# Altium PCB Capybara.PcbDoc (part 4 of 5)
Units mil, origin at the board's own origin, x right, y up, seen from the top; angles counter-clockwise.
Board outline 2270 x 2270 mil, 4 copper layers (Top Layer, GND, Signal, Bottom Layer), stack 61.8 mil thick; 394 components, 234 nets, 1155 pads, 211 vias.
Unrouted connection lines stored in the file: 4.
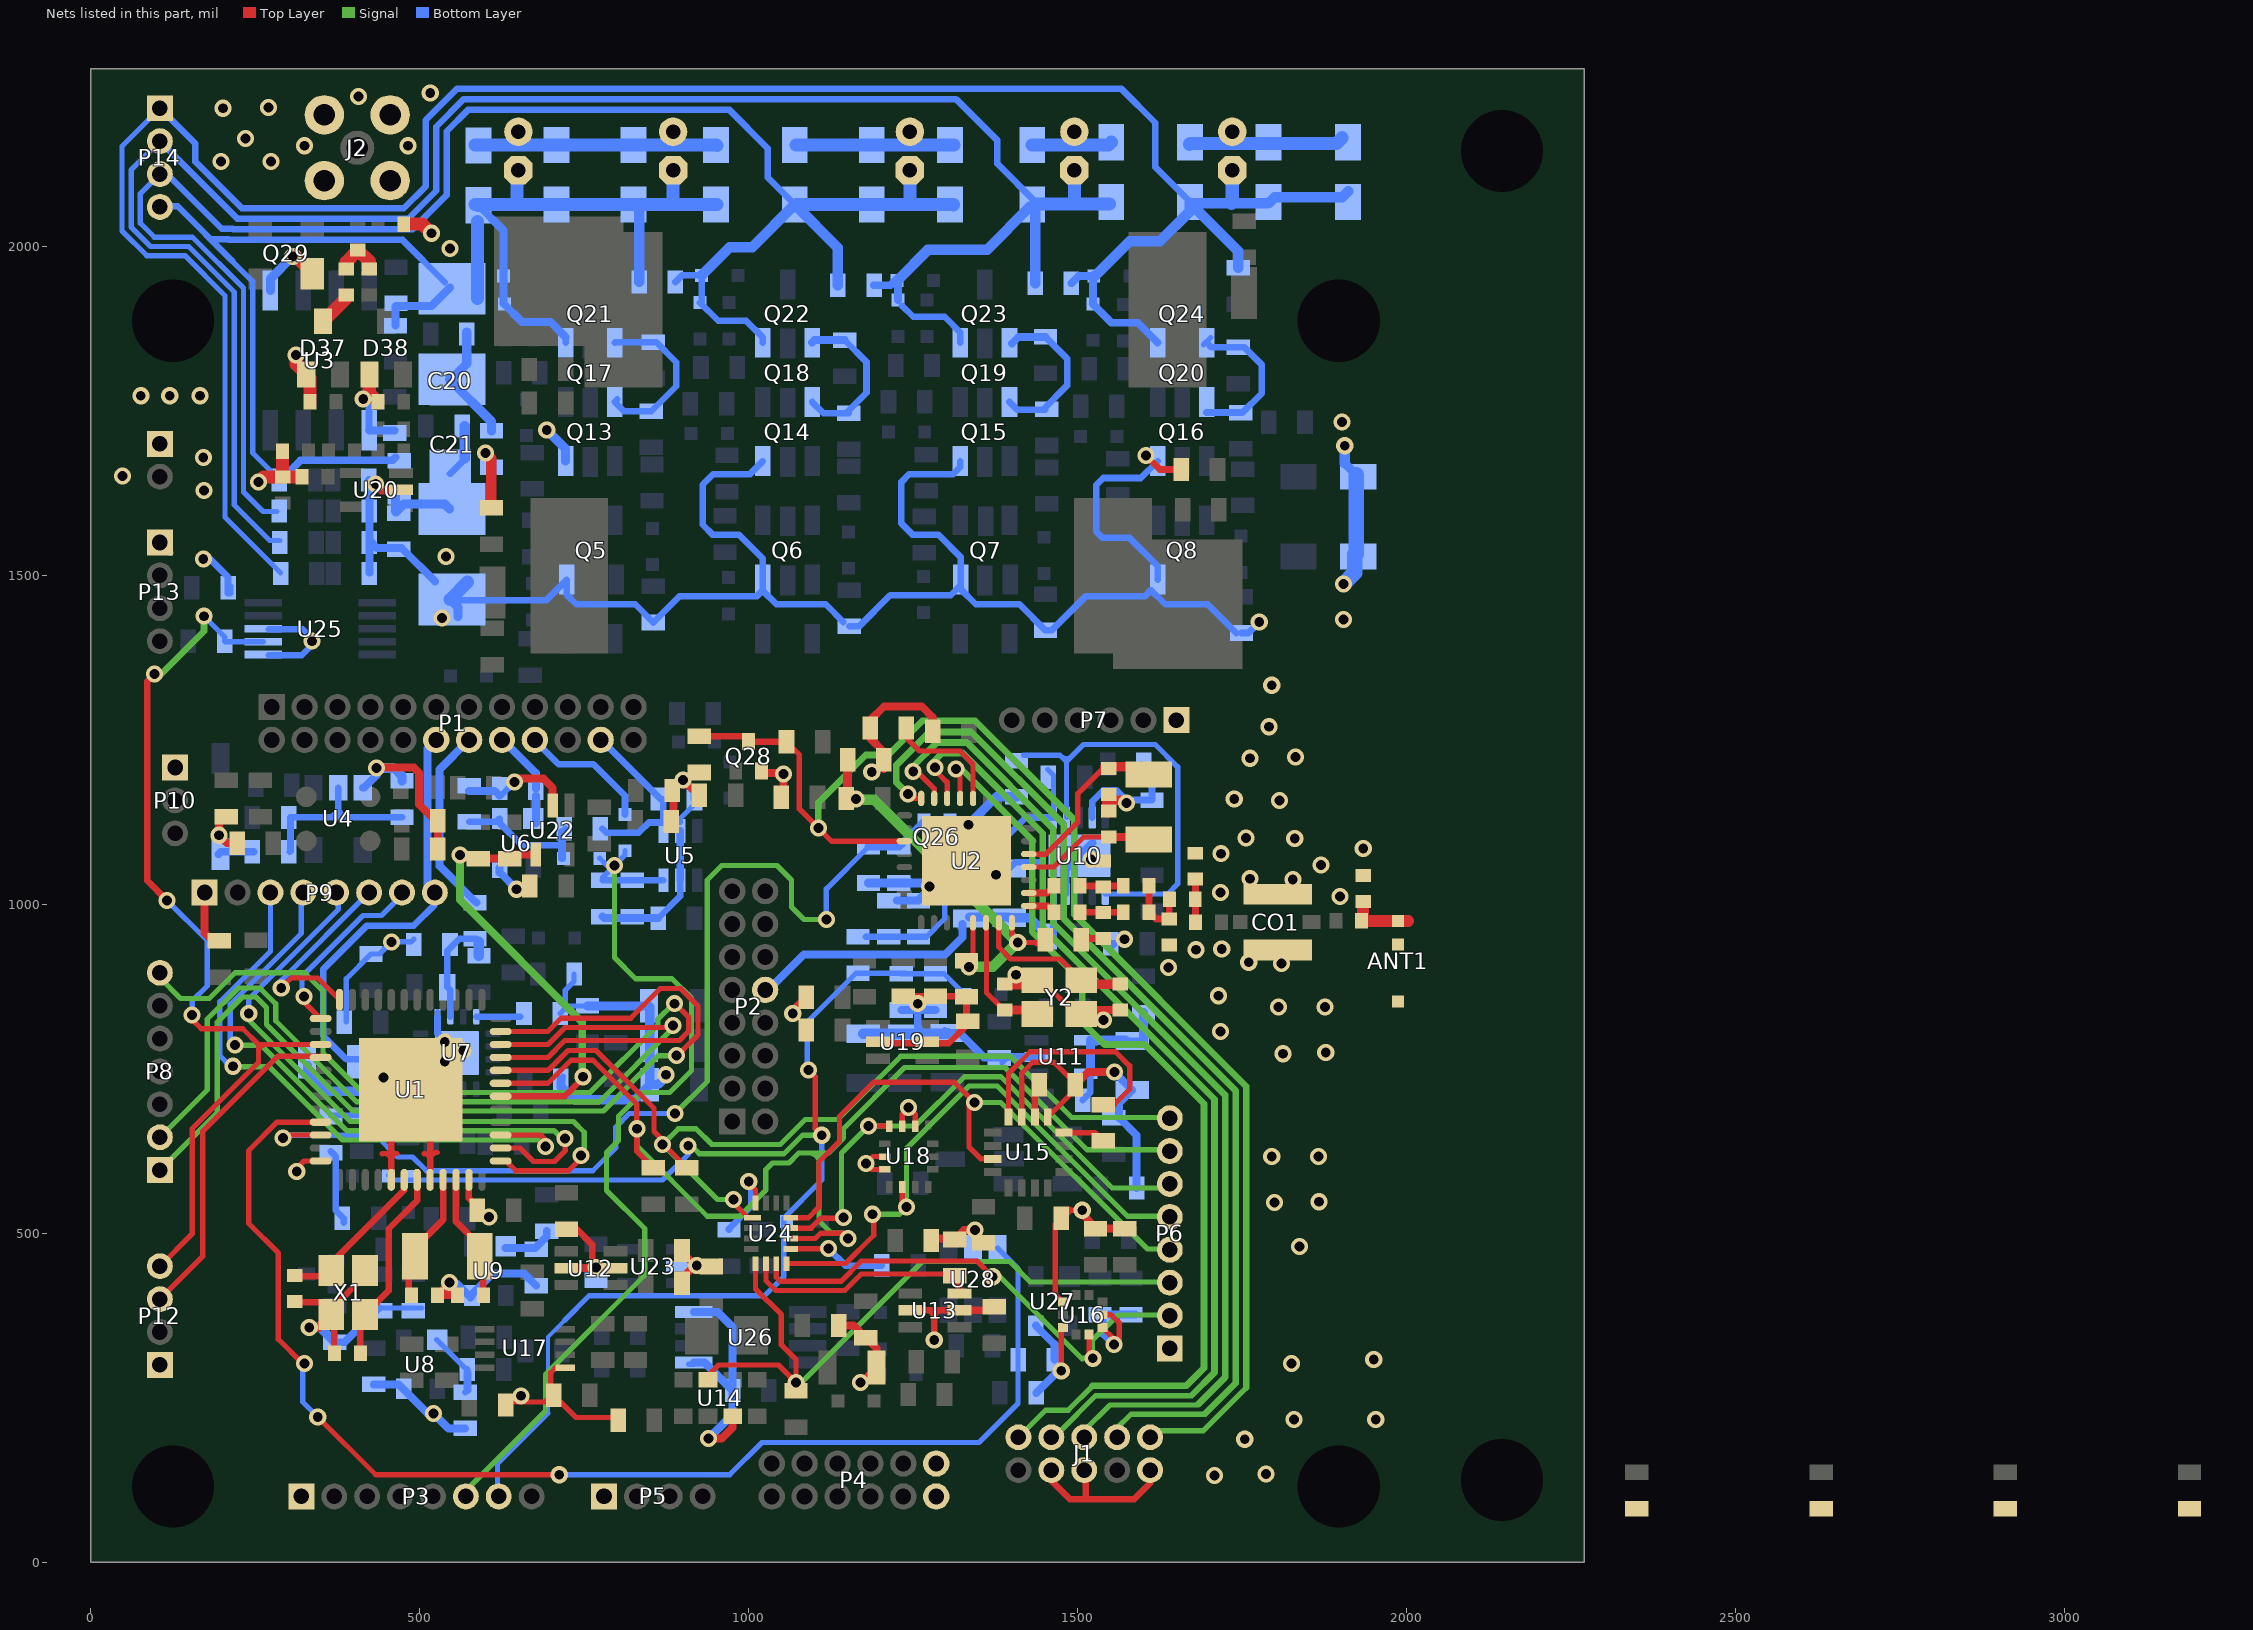
[diagram p4: the nets of this part, all layers, seen from the top]

## Via types
v1: diameter 26, hole 15, Top Layer to Bottom Layer, tented both sides, 209 vias
v2: diameter 26, hole 15, Top Layer to Bottom Layer, tented bottom, 2 vias

## Nets (pads, with @x,y where several pads share a name; then routed paths per layer and width w, separated by ;. In a path a pad name is that pad's centre, name@x,y a point inside that pad or via, vN(x,y) a via of type N, cw(c..) or ccw(c..) an arc to the next point about the centre after c; other vN are vias at no path point) (continued)
NetC20_3: (continued)
  Bottom Layer w10: C20.3@546,1654.27 C20.3@569.56,1677.83
  Bottom Layer w14: R37.2@463,1624.44 463,1597.56 464,1596.56 475.88,1608.44 537.71,1608.44 C21.3@545,1601.15
  Bottom Layer w16: C20.3@568.56,1677.83 R35.2@568.56,1727
NetC26_2: C26.2 R49.1 R51.2 U4.2 | length 323.2
  Bottom Layer w8: 356,1133 ccw(c359.5,1149.5) 376,1146 ccw(c394.28,1150.72) 399,1132.44
  Bottom Layer w10: R51.2@302.56,1080 303.56,1081 R49.1@303.56,1132 ; R49.1@303.56,1132.44 377,1132.44 ; U4.2@376,1177.24 376,1133.44 377,1132.44 ; C26.2@473,1132.44 377,1132.44
NetC33_2: C33.2 D30.1 R52.1 U6.1 | length 211.3
  Bottom Layer w10: C33.2@575,1125.44 616.45,1125.44 U6.1@621.41,1130.4 621.41,1123.59 655,1090 716.44,1090 ; R52.1@716.44,1110 R52.1@721.44,1115
  Bottom Layer w12: D30.1@716.44,1070 716.44,1090 R52.1@716.44,1110
NetC37_2: C37.2 R56.1 U8.2 | length 109.2
  Bottom Layer w8: U8.2@525.59,338.4 572.44,291.55 574.22,289.78 572.44,288 R56.1@571,286.56
  Bottom Layer w10: C37.2@569,258.56 C37.2@572.44,262 ; R56.1@572.44,288 572.44,291.55 R56.1@572.44,293
  Bottom Layer w12: C37.2@572.44,262 R56.1@572.44,288
NetC38_1: C38.1 L1.1 R54.2 R55.2 U7.2 | length 181.1
  Bottom Layer w10: U7.2@546.63,829.24 546.63,869.37 L1.1@542,874 542,929.44 560,947.44 586,947.44 R54.2@590,943.44
  Bottom Layer w16: R55.2@590,921.56 R54.2@590,943.44
NetC41_2: C41.2 U7.4 | length 67
  Bottom Layer w10: U7.4@586,829.24 C41.2@653,829.24
NetC42_2: C42.2 R62.2 U9.2 | length 78
  Bottom Layer w12: U9.2@630.59,477.4 675.16,477.4 693,495.24 R62.2@693,503.44
NetC47_2: C47.2 R75.1 R76.2 U11.4 U11.5 | length 219.6
  Bottom Layer w10: R75.1@1507.56,702.47 1519.4,714.31 U11.5@1519.4,742.41 ; C47.2@1572.81,793.59 1574,792.4 1599,792.4 C47.2@1600,793.4
  Bottom Layer w14: U11.5@1519.4,742.41 1519.4,793.59 C47.2@1572.81,793.59 ; C47.2@1600,793.4 R76.2@1600,835.44
NetC50_2: C50.2 U10.1 U10.7 | length 659.6
  Bottom Layer w8: C50.2@1418,1226.56 1473.27,1226.56 1482.91,1216.91 ; 1475.83,1224 ccw(c1482.91,1232.59) 1491.5,1225.5 ; U10.7@1482.91,1132.02 1482.91,1216.91 ; U10.1@1541.97,1015.87 1636.87,1015.87 1652,1031 1652,1209 1618,1243 1509,1243 1491.5,1225.5 ; 1482.91,1216.91 1491.5,1225.5
NetC65_1: C65.1 U15.10 | length 40.5
  Top Layer w10: U15.10@1434.84,677 C65.1@1434.84,717.53
NetC66_1: C66.1 U15.8 | length 65.3
  Top Layer w8: U15.8@1478.94,653 1526.44,653 C66.1@1539,640.44
NetC66_2: C66.2 U15.12 | length 355.8
  Top Layer w8: U15.12@1395,677 1395,743.03 1427.97,776 1557.53,776 1579,754.53 1579,719 1555.56,695.56 C66.2@1541,695.56
NetC77_2: C77.2 C78.2 C79.2 L3.1 U2.29 U2.32 | length 604.8
  Top Layer w8: C77.2@1331,914.56 1340.94,924.5 U2.29@1340.94,972 ; U2.32@1400,972 1400,954 v1@1409,945 ; v1(1409,942) 1436.44,942 1438.44,940 C79.2@1446.44,948
  Top Layer w14: L3.1@1148.44,1164 1150.24,1165.8 1150.24,1206 C78.2@1150.24,1211
  Signal w16: v1@1163,1159 1191,1159 1408,942 1371,905 v1(1335,905)
  other v1: 1163,1160
NetC80_2: C80.2 U2.30 Y2.3 | length 162
  Top Layer w8: U2.30@1361.37,971.02 1361.37,865.63 C80.2@1384,843
  Top Layer w14: C80.2@1390,839.31 1414.63,839.31
NetC81_1: C81.1 U2.31 Y2.1 | length 239
  Top Layer w8: U2.31@1380.31,972 1380,971.69 1380,935 1398,917 1473.06,917 1487.46,902.59 1487.46,890.59 Y2.1@1493.37,884.69
  Top Layer w14: Y2.1@1493.37,878.69 C81.1@1554,878.69
NetC82_2: C82.2 U2.12 | length 168.6
  Top Layer w8: C82.2@1240.56,1252 1259.56,1233 1321.03,1233 1340.94,1213.09 U2.12@1340.94,1160.98
NetC83_2: C83.2 U2.5 Y1.2 | length 270.9
  Top Layer w8: U2.5@1425.59,1076.33 1451.93,1076.33 1500,1124.4 1500,1168 C83.2@1541,1209
  Top Layer w14: C83.2@1541,1209 1592.21,1209 Y1.2@1609,1192.21
NetC84_2: C84.2 U2.4 Y1.1 | length 206.2
  Top Layer w8: U2.4@1425.59,1056.65 1463.65,1056.65 1509.31,1102.31 C84.2@1547,1102.31 ; Y1.1@1599.53,1102.31 Y1.1@1608.53,1093.31
  Top Layer w12: C84.2@1547,1102.31 Y1.1@1599.53,1102.31
  Top Layer w14: Y1.1@1608.53,1093.31 Y1.1@1609,1093.79
NetC86_1: C86.1 C88.2 L5.1 L7.2 | length 105
  Top Layer w10: C88.2@1639.31,978 L5.1@1639.31,1008
  Top Layer w10.42: L7.2@1608.69,1028 C86.1@1608.69,988 1619,977.69 C88.2@1639,977.69
  Top Layer w15: C88.2@1639,977.69 C88.2@1639.31,978
NetC86_2: C86.2 C87.1 L4.1 | length 66.3
  Top Layer w10.42: C87.1@1503.69,988 1538.69,988 L4.1@1539,987.69 1539.31,988 C86.2@1569.31,988
  Top Layer w14: C86.2@1569,987.69 C86.2@1569.31,988
NetC89_2: C89.2 L5.2 L6.1 | length 66.6
  Top Layer w10.42: C89.2@1679,1038.31 1679,1008.31 L5.2@1678.69,1008 1679.31,1007.37 L6.1@1679.31,973
  Top Layer w14: L6.1@1678.69,973.63 L6.1@1679.31,973
NetC90_1: C90.1 C92.2 L7.1 | length 67.9
  Top Layer w10.42: C90.1@1503.69,1028 1537.31,1028 C92.2@1539,1026.31 1540.69,1028 L7.1@1569.31,1028
  Top Layer w15: C92.2@1538.69,1028 C92.2@1539,1028.31 ; L7.1@1569,1028.31 L7.1@1569.31,1028
NetC94_1: C94.1 C99.1 L8.2 | length 71.8
  Top Layer w20.2: C94.1@388,1965.69 388,1976.31 L8.2@406,1994.31 423,1977.31 C99.1@423,1965.69
NetC94_2: C94.2 D37.3 | length 59.4
  Top Layer w10.42: D37.3@353,1886.35 D37.3@353,1891.31
  Top Layer w20.2: D37.3@353,1886.35 388,1921.35 C94.2@388,1926.31